# EAGLE board PickupPanel (EAGLE 7.4.0)
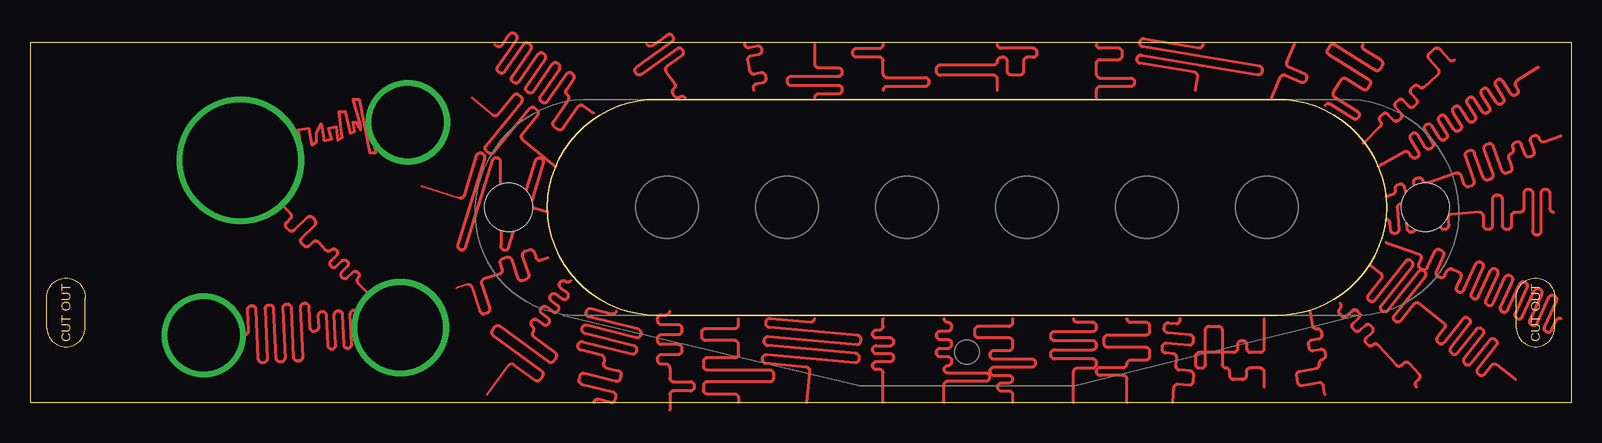
[diagram p0: board, top side]
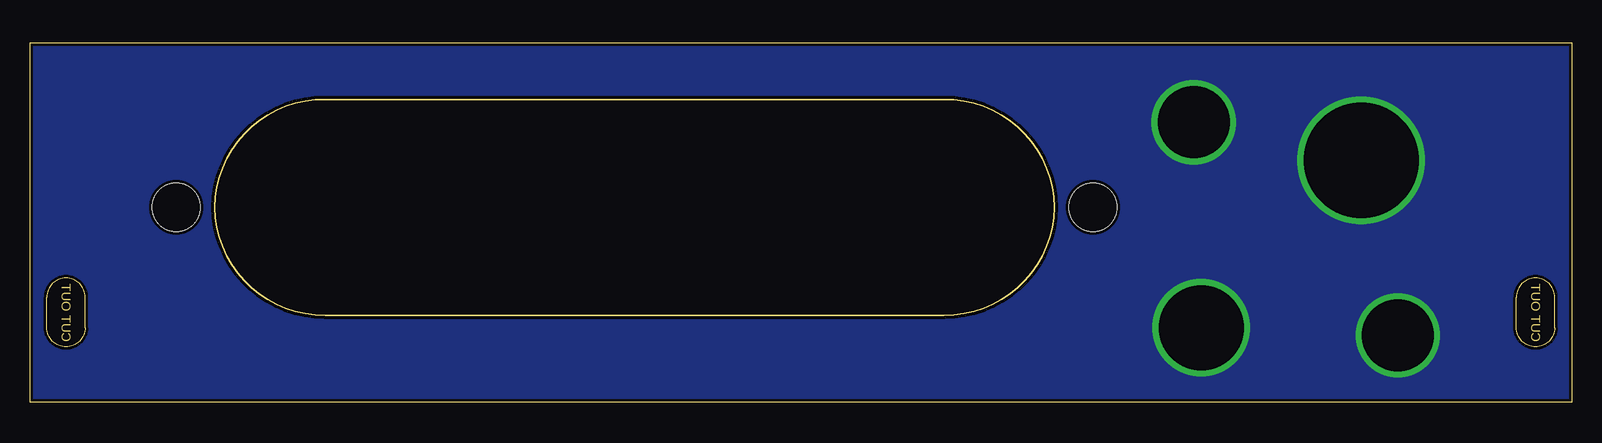
[diagram p1: board, bottom side, seen from below]

Size 128.5 x 30 mm. Coordinates in mm from the lower left corner, seen from the top.
Outline: 0,30 0,0 128.5,0 128.5,30 0,30
Copper layers (1*2*15*16): Top 0.035mm / dielectric 0.2mm / Route2 0.0175mm / dielectric 1.1mm / Route15 0.0175mm / dielectric 0.2mm / Bottom 0.035mm
Design rules "SeeedStudio_DRU_no_angle_20130527": minimum track width 6mil, minimum drill 12mil, track to track 6mil, track to pad 6mil, pad to pad 6mil, via to via 6mil, smd to smd 0mil, copper to edge 10mil, drill to drill 10mil, minimum pad ring 6mil, minimum via ring 6mil, stop-mask expansion 2mil, vias tented up to drill 25mil, thermal gap 10mil
Net classes: 0 default: width 0.203 mm; 1 power: width 0.406 mm; 2 ground: width 0.406 mm

## Footprints (pad centres in the part's own frame; a part is rotated, then mirrored left to right if it is on the bottom)
SINGLE_COIL_CUTOUT = hole 4: -38.2,0; 38.2,0

## Placement (x,y rotation side)
U$1  [SINGLE_COIL_CUTOUT]  78.11,16.27 0 top
U$2  [SLOT_HOLE]  3,7.5 90 top
U$4  [SLOT_HOLE]  125.5,7.5 90 top

## Library data of the parts
U$1 U$2 U$4 = MusicThingModular

## Tracks (layer width: path | path; a pad name or v marks a point on that pad's centre or on a via)
GND  (via drill 6, 7.1, 9.6)
  other vias: 31.5,23.36 14.48,5.58 30.86,6.21 17.52,20.18
  pour Bottom: -8.89,36.2 132.72,35.56 131.44,-0.64 -1.27,-1.27
N$1
  Top 0.254: 125.73,27.94 123.95,26.82 arc90 123.85,26.38 124.02,26.12 arc-90 123.92,25.68 123.86,25.65 arc-90 123.42,25.75 122.76,26.8 arc90 122.32,26.9 122.27,26.86 arc90 122.17,26.43 122.83,25.37 arc-90 122.73,24.94 122.68,24.9 arc-90 122.24,25 121.58,26.05 arc90 121.14,26.15 121.08,26.12 arc90 120.99,25.68 121.65,24.63 arc-90 121.55,24.19 121.5,24.16 arc-90 121.06,24.25 120.39,25.31 arc90 119.96,25.41 119.9,25.37 arc90 119.8,24.93 120.47,23.88 arc-90 120.37,23.44 120.32,23.41 arc-90 119.88,23.51 119.21,24.56 arc90 118.78,24.66 118.72,24.62 arc90 118.62,24.19 119.29,23.14 arc-90 119.19,22.7 119.13,22.66 arc-90 118.7,22.76 118.03,23.81 arc90 117.59,23.91 117.54,23.88 arc90 117.44,23.44 118.11,22.39 arc-90 118.01,21.95 117.95,21.92 arc-90 117.51,22.02 116.85,23.07 arc90 116.41,23.17 116.36,23.13 arc90 116.26,22.69 116.92,21.64 arc-90 116.82,21.2 116.77,21.17 arc-90 116.33,21.27 115.67,22.32 arc90 115.23,22.42 115.17,22.39 arc90 115.08,21.95 115.74,20.89 arc-90 115.64,20.46 115.59,20.42 arc-90 115.15,20.52 114.99,20.78 arc90 114.55,20.88 112.39,19.68
N$2
  Top 0.254: 118.75,28.57 arc-90 118.3,28.6 117.52,29.46 arc90 117.07,29.48 116.64,29.1 arc90 116.62,28.65 117.4,27.79 arc-90 117.37,27.34 116.23,26.31 arc-90 115.78,26.34 arc90 115.34,26.36 115.16,26.2 arc90 115.14,25.76 115.56,25.29 arc-90 115.54,24.84 115.37,24.68 arc-90 114.92,24.7 114.49,25.18 arc90 114.05,25.2 113.87,25.04 arc90 113.85,24.6 114.27,24.12 arc-90 114.25,23.68 114.08,23.52 arc-90 113.63,23.54 113.2,24.02 arc90 112.76,24.04 112.58,23.88 arc90 112.56,23.43 arc-90 112.53,22.99 111.12,21.59
N$3
  Top 0.254: 127.64,22.23 126.25,21.73 arc-90 125.84,21.92 125.8,22.04 arc90 125.39,22.24 125.26,22.19 arc90 125.06,21.78 125.36,20.94 arc-90 125.17,20.53 125.04,20.48 arc-90 124.63,20.68 124.33,21.52 arc90 123.92,21.71 123.79,21.66 arc90 123.6,21.26 123.64,21.14 arc-90 123.45,20.73 arc90 123.26,20.32 123.52,19.59 arc-90 123.33,19.19 123.13,19.12 arc-90 122.73,19.31 121.99,21.37 arc90 121.59,21.56 121.4,21.49 arc90 121.2,21.09 121.94,19.03 arc-90 121.75,18.62 121.56,18.56 arc-90 121.15,18.75 120.42,20.81 arc90 120.01,21 119.82,20.93 arc90 119.63,20.52 120.36,18.47 arc-90 120.17,18.06 119.98,17.99 arc-90 119.57,18.19 119.31,18.91 arc90 118.91,19.11 116.5,18.3 arc-90 116.1,18.5 arc90 115.7,18.7 115.53,18.65 arc90 115.33,18.25 115.53,17.65 arc-90 115.33,17.25 115.17,17.19 arc-90 114.77,17.39 114.57,17.99 arc90 114.17,18.19 114,18.14 arc90 113.8,17.74 arc-90 113.6,17.34 113.03,17.14
N$4
  Top 0.254: 113.03,15.24 arc-90 113.37,14.95 113.42,14.37 arc90 113.76,14.08 113.82,14.09 arc90 114.11,14.43 113.96,16.22 arc-90 114.25,16.56 114.31,16.56 arc-90 114.66,16.27 114.8,14.48 arc90 115.14,14.19 115.2,14.2 arc90 115.49,14.54 115.34,16.33 arc-90 115.64,16.67 115.69,16.68 arc-90 116.04,16.39 116.18,14.6 arc90 116.52,14.31 116.58,14.31 arc90 116.87,14.65 116.73,16.44 arc-90 117.02,16.78 117.08,16.79 arc-90 117.42,16.5 117.56,14.71 arc90 117.91,14.42 117.96,14.42 arc90 118.25,14.77 118.21,15.34 arc-90 118.5,15.69 120.82,15.88 arc-90 121.14,15.56 121.14,14.77 arc90 121.45,14.45 121.61,14.45 arc90 121.93,14.77 121.93,16.98 arc-90 122.25,17.3 122.4,17.3 arc-90 122.72,16.98 122.72,14.77 arc90 123.03,14.45 123.19,14.45 arc90 123.51,14.77 123.51,15.56 arc-90 123.83,15.88 124.23,15.88 arc90 124.55,16.19 124.55,17.46 arc-90 124.87,17.78 124.94,17.78 arc-90 125.26,17.46 125.26,14.29 arc90 125.58,13.97 125.66,13.97 arc90 125.97,14.29 125.97,17.46 arc-90 126.29,17.78 126.36,17.78 arc-90 126.68,17.46 126.68,16.19 arc90 127,15.88
N$5
  Top 0.254: 113.03,13.34 115.79,12.37 arc-90 115.94,11.95 115.77,11.57 arc90 115.93,11.15 116.08,11.08 arc90 116.5,11.24 117.11,12.58 arc-90 117.53,12.73 117.67,12.67 arc-90 117.83,12.25 117.22,10.91 arc90 117.38,10.49 117.53,10.42 arc90 117.95,10.58 118.12,10.96 arc-90 118.55,11.12 119.12,10.86 arc-90 119.27,10.44 118.91,9.64 arc90 119.07,9.22 119.1,9.2 arc90 119.52,9.36 120.51,11.53 arc-90 120.93,11.69 120.96,11.68 arc-90 121.12,11.26 120.13,9.08 arc90 120.29,8.66 120.32,8.65 arc90 120.74,8.81 121.73,10.98 arc-90 122.15,11.14 122.19,11.12 arc-90 122.34,10.7 121.36,8.53 arc90 121.51,8.11 121.55,8.09 arc90 121.97,8.25 122.95,10.42 arc-90 123.37,10.58 123.41,10.57 arc-90 123.56,10.15 122.58,7.97 arc90 122.73,7.55 122.77,7.54 arc90 123.19,7.7 124.17,9.87 arc-90 124.59,10.03 124.63,10.01 arc-90 124.79,9.59 123.8,7.42 arc90 123.96,7 123.99,6.98 arc90 124.41,7.14 125.4,9.31 arc-90 125.82,9.47 125.85,9.46 arc-90 126.01,9.04 125.02,6.86 arc90 125.18,6.44 125.21,6.43 arc90 125.63,6.59 126.62,8.76 arc-90 127.04,8.91 127.07,8.9 arc-90 127.23,8.48 126.24,6.31 arc90 126.4,5.89 126.43,5.87 arc90 126.85,6.03 127.22,6.83 arc-90 127.64,6.99
N$6
  Top 0.254: 111.76,11.43 112.6,10.76 arc-90 112.66,10.32 111.57,8.94 arc90 111.62,8.5 111.67,8.46 arc90 112.11,8.52 114.67,11.77 arc-90 115.12,11.82 115.16,11.79 arc-90 115.22,11.34 112.65,8.09 arc90 112.7,7.64 112.74,7.61 arc90 113.19,7.66 115.75,10.91 arc-90 116.2,10.97 116.24,10.93 arc-90 116.29,10.49 113.73,7.24 arc90 113.78,6.79 113.82,6.76 arc90 114.27,6.81 115.36,8.19 arc-90 115.8,8.24 117.85,6.62 arc-90 117.91,6.17 117.32,5.44 arc90 117.38,4.99 117.44,4.94 arc90 117.88,5 119.44,6.97 arc-90 119.89,7.02 119.94,6.97 arc-90 120,6.53 118.44,4.55 arc90 118.49,4.11 118.55,4.06 arc90 119,4.11 120.56,6.09 arc-90 121,6.14 121.06,6.09 arc-90 121.11,5.65 119.56,3.67 arc90 119.61,3.23 119.67,3.18 arc90 120.12,3.23 121.67,5.21 arc-90 122.12,5.26 122.18,5.21 arc-90 122.23,4.76 120.67,2.79 arc90 120.73,2.35 120.79,2.3 arc90 121.23,2.35 121.81,3.09 arc-90 122.26,3.14 123.83,1.91
N$7
  Top 0.254: 115.57,1.27 115.54,1.3 arc-90 115.56,1.75 115.76,1.93 arc90 115.78,2.38 114.98,3.25 arc90 114.53,3.27 114.34,3.1 arc-90 113.89,3.12 112.4,4.76 arc90 111.95,4.78 arc-90 111.5,4.8 111.38,4.94 arc-90 111.4,5.38 111.87,5.81 arc90 111.89,6.26 111.77,6.4 arc90 111.32,6.42 110.85,5.99 arc-90 110.4,6.01 110.28,6.15 arc-90 110.3,6.6 110.77,7.02 arc90 110.79,7.47 110.67,7.61 arc90 110.22,7.63 109.75,7.2 arc-90 109.3,7.22 109.18,7.36 arc-90 109.2,7.81 arc90 109.22,8.26
N$8
  Top 0.254: 106.68,7.62 106.9,6.4 arc90 107.27,6.14 arc-90 107.64,5.88 107.68,5.66 arc-90 107.43,5.29 106.8,5.17 arc90 106.55,4.8 106.59,4.57 arc90 106.96,4.32 107.58,4.43 arc-90 107.95,4.17 107.99,3.94 arc-90 107.74,3.58 arc90 107.48,3.21 arc-90 107.23,2.84 105.84,2.58 arc90 105.58,2.21 105.69,1.64 arc90 106.06,1.39 107.44,1.64 arc-90 107.81,1.38 107.95,0.64
N$9
  Top 0.254: 102.87,6.99 102.87,4.47 arc-90 102.55,4.15 101.76,4.15 arc-90 101.44,4.47 101.44,4.81 arc90 101.12,5.13 100.97,5.13 arc90 100.65,4.81 100.65,4.47 arc-90 100.33,4.15 97.47,4.15 arc90 97.16,3.83 97.16,3.17 arc90 97.47,2.86 97.67,2.86 arc90 97.98,3.17 97.98,6.03 arc-90 98.3,6.35 99.06,6.35 arc-90 99.38,6.03 99.38,3.17 arc90 99.69,2.86 arc-90 100.01,2.54 100.01,2.22 arc90 100.33,1.91 101.07,1.91 arc90 101.39,2.22 101.39,2.54 arc-90 101.71,2.86 102.55,2.86 arc-90 102.87,2.54 102.87,1.27
N$10
  Top 0.254: 95.25,0 95.36,1.24 arc-90 95.71,1.53 96.62,1.44 arc90 96.97,1.73 97.01,2.26 arc90 96.73,2.61 95.81,2.69 arc-90 95.53,3.03 95.59,3.7 arc90 95.3,4.05 94.67,4.11 arc-90 94.39,4.45 94.4,4.66 arc-90 94.75,4.95 96.64,4.78 arc90 96.98,5.07 97,5.28 arc90 96.71,5.62 94.83,5.79 arc-90 94.54,6.14 94.56,6.35 arc-90 94.9,6.64 95.53,6.58 arc90 95.88,6.87 95.89,6.99
N$11
  Top 0.254: 91.44,0 91.44,1.92 arc90 91.12,2.24 89.22,2.24 arc-90 88.9,2.56 88.9,2.59 arc-90 89.22,2.9 91.12,2.9 arc90 91.44,3.22 arc-90 91.76,3.54 93.03,3.54 arc90 93.34,3.86 93.34,4.26 arc90 93.03,4.58 89.85,4.58 arc-90 89.53,4.9 89.53,5.31 arc-90 89.85,5.62 93.03,5.62 arc90 93.34,5.94 93.34,6.35 arc90 93.03,6.67 91.76,6.67 arc-90 91.44,6.99
N$12
  Top 0.254: 87,0 87,2.55 arc-90 87.31,2.86 88.58,2.86 arc90 88.9,3.18 88.9,3.31 arc90 88.58,3.62 85.41,3.62 arc-90 85.09,3.94 85.09,4.07 arc-90 85.41,4.38 88.58,4.38 arc90 88.9,4.7 88.9,4.83 arc90 88.58,5.15 85.41,5.15 arc-90 85.09,5.46 85.09,5.59 arc-90 85.41,5.91 88.58,5.91 arc90 88.9,6.22 88.9,6.35 arc90 88.58,6.67 87.31,6.67 arc-90 87,6.99
N$13
  Top 0.254: 81.92,6.99 81.92,6.65 arc-90 81.6,6.33 79.06,6.33 arc90 78.74,6.01 78.74,5.71 arc90 79.06,5.4 81.6,5.4 arc-90 81.92,5.08 81.92,4.62 arc-90 81.6,4.31 80.33,4.31 arc90 80.01,3.99 80.01,3.94 arc90 80.33,3.62 83.5,3.62 arc-90 83.82,3.3 83.82,3.25 arc-90 83.5,2.93 80.33,2.93 arc90 80.01,2.61 80.01,2.56 arc90 80.33,2.24 81.6,2.24 arc-90 81.92,1.92 arc-90 81.6,1.6 80.96,1.6 arc90 80.64,1.29 80.64,1.27 arc90 80.96,0.95 81.6,0.95 arc-90 81.92,0.64 81.92,0
N$14
  Top 0.254: 76.2,0 76.2,1.46 arc-90 76.52,1.77 79.69,1.77 arc90 80.01,2.09 80.01,2.12 arc90 79.69,2.44 76.52,2.44 arc-90 76.2,2.75 arc-90 76.52,3.07 arc90 76.83,3.39 76.83,3.47 arc90 76.52,3.79 75.88,3.79 arc-90 75.56,4.11 75.56,4.19 arc-90 75.88,4.51 76.52,4.51 arc90 76.83,4.83 76.83,4.91 arc90 76.52,5.23 75.88,5.23 arc-90 75.56,5.55 75.56,5.63 arc-90 75.88,5.95 76.52,5.95 arc90 76.83,6.27 76.83,6.35 arc90 76.52,6.67 arc-90 76.2,6.99
N$15
  Top 0.254: 71.12,0 71.12,2.42 arc90 70.8,2.74 70.55,2.74 arc-90 70.23,3.06 70.23,3.08 arc-90 70.55,3.4 71.69,3.4 arc90 72.01,3.71 72.01,3.74 arc90 71.69,4.06 70.55,4.06 arc-90 70.23,4.37 70.23,4.4 arc-90 70.55,4.71 71.69,4.71 arc90 72.01,5.03 72.01,5.06 arc90 71.69,5.37 70.55,5.37 arc-90 70.23,5.69 70.23,5.71 arc-90 70.55,6.03 70.8,6.03 arc90 71.12,6.35 71.12,6.99
N$16
  Top 0.254: 64.77,0 65,2.59 arc90 64.72,2.93 61.35,3.24 arc-90 61.07,3.58 61.08,3.7 arc-90 61.42,3.99 68.78,3.32 arc90 69.13,3.61 69.14,3.73 arc90 68.85,4.07 61.49,4.74 arc-90 61.2,5.09 61.21,5.21 arc-90 61.56,5.5 68.92,4.83 arc90 69.26,5.12 69.28,5.24 arc90 68.99,5.58 61.63,6.25 arc-90 61.34,6.59 61.35,6.72 arc-90 61.7,7 65.06,6.7 arc90 65.41,6.99
N$17
  Top 0.254: 59.05,6.99 59.05,6.48 arc-90 58.74,6.16 56.33,6.16 arc90 56.01,5.84 56.01,5.48 arc90 56.33,5.16 58.74,5.16 arc-90 59.05,4.84 59.05,4.02 arc-90 58.74,3.7 56.45,3.7 arc90 56.13,3.38 56.13,3.02 arc90 56.45,2.7 61.66,2.7 arc-90 61.98,2.38 61.98,2.02 arc-90 61.66,1.7 56.45,1.7 arc90 56.13,1.38 56.13,1.02 arc90 56.45,0.7 58.74,0.7 arc-90 59.05,0.38 59.05,0
N$18
  Top 0.254: 53.34,-0.64 53.34,0.64 arc-90 53.66,0.95 55.05,0.95 arc90 55.37,1.27 55.37,1.4 arc90 55.05,1.72 53.66,1.72 arc-90 53.34,2.03 53.34,2.86 arc90 53.02,3.17 52.64,3.17 arc-90 52.32,3.49 52.32,3.68 arc-90 52.64,4 54.04,4 arc90 54.36,4.32 54.36,4.51 arc90 54.04,4.83 52.64,4.83 arc-90 52.32,5.14 52.32,5.33 arc-90 52.64,5.65 54.04,5.65 arc90 54.36,5.97 54.36,6.16 arc90 54.04,6.48 52.64,6.48 arc-90 52.32,6.79 52.32,6.99 arc-90 52.64,7.3 53.02,7.3 arc90 53.34,7.62
N$19
  Top 0.254: 46.99,0 arc-90 47.38,0.23 48.37,-0.02 arc90 48.76,0.21 48.83,0.48 arc90 48.59,0.87 45.98,1.52 arc-90 45.75,1.91 45.82,2.17 arc-90 46.2,2.41 48.81,1.75 arc90 49.2,1.98 49.27,2.25 arc90 49.04,2.64 48.04,2.89 arc-90 47.81,3.27 47.88,3.55 arc90 47.65,3.93 45.9,4.37 arc-90 45.67,4.75 45.69,4.83 arc-90 46.07,5.06 50.18,4.03 arc90 50.56,4.26 50.58,4.34 arc90 50.35,4.72 46.25,5.75 arc-90 46.02,6.14 46.03,6.21 arc-90 46.42,6.44 50.52,5.42 arc90 50.91,5.65 50.93,5.72 arc90 50.7,6.11 46.59,7.13 arc-90 46.36,7.52 46.38,7.59 arc-90 46.77,7.83 48.51,7.39 arc90 48.9,7.62
N$20
  Top 0.152: 38.1,0.64 39.89,3.07
  Top 0.203: 39.89,3.07 arc-90 40.33,3.14 42.09,1.85
  Top 0.254: 42.09,1.85 arc90 42.54,1.92 42.72,2.17 arc90 42.66,2.62 38.62,5.58 arc-90 38.55,6.02 38.74,6.28 arc-90 39.18,6.34 43.22,3.38 arc90 43.66,3.45 43.85,3.71 arc90 43.78,4.15 42.02,5.44 arc-90 41.95,5.89 arc90 41.88,6.33 arc-90 41.81,6.78 41.83,6.8 arc-90 42.28,6.87 42.79,6.49 arc90 43.23,6.56 43.25,6.59 arc90 43.18,7.03 42.67,7.41 arc-90 42.6,7.85 42.62,7.87 arc-90 43.06,7.94 43.58,7.57 arc90 44.02,7.63 44.04,7.66 arc90 43.97,8.1 43.46,8.48 arc-90 43.39,8.92 43.41,8.95 arc-90 43.85,9.02 44.37,8.64 arc90 44.81,8.71 44.83,8.73 arc90 44.76,9.18 44.25,9.55 arc-90 44.18,10 44.2,10.02 arc-90 44.64,10.09 arc90 45.09,10.16
N$21
  Top 0.152: 36.44,9.82 35.56,9.53
  Top 0.203: 37.51,7.59 36.84,9.62 arc90 36.44,9.82
  Top 0.254: 37.51,7.59 arc90 37.91,7.39 38.11,7.45 arc90 38.31,7.86 37.64,9.88 arc-90 37.84,10.28 39.17,10.73 arc90 39.37,11.13 39.22,11.59 arc-90 39.42,12 39.75,12.11 arc-90 40.15,11.9 40.66,10.37 arc90 41.06,10.17 41.39,10.28 arc90 41.59,10.69 41.08,12.22 arc-90 41.28,12.62 41.61,12.73 arc-90 42.01,12.53 42.17,12.06 arc90 42.57,11.86 43.18,12.06
N$22
  Top 0.152: 32.64,18.03 35.82,17.06
  Top 0.254: 35.82,17.06 arc90 36.22,17.27 37.24,20.59 arc-90 37.63,20.8 37.68,20.78 arc-90 37.89,20.39 35.66,13.14 arc90 35.87,12.74 35.92,12.73 arc90 36.31,12.94 38.54,20.18 arc-90 38.94,20.39 38.98,20.38 arc-90 39.2,19.98 39.25,13.12 arc90 39.46,12.72 39.51,12.71 arc90 39.9,12.92 42.13,20.16 arc-90 42.53,20.37 42.58,20.36 arc-90 42.79,19.96 41.77,16.64 arc90 41.98,16.25 43.18,15.88
N$23
  Top 0.152: 38.57,23.97 36.83,25.4
  Top 0.254: 43.81,19.68 41.07,21.93 arc-90 41.02,22.38 42.31,23.95 arc90 42.27,24.39 42.09,24.54 arc90 41.64,24.49 38.67,20.86 arc-90 38.22,20.82 38.05,20.96 arc-90 38,21.41 40.97,25.04 arc90 40.93,25.49 40.75,25.63 arc90 40.3,25.59 39.02,24.02 arc-90 38.57,23.97
N$24
  Top 0.203: 38.91,29.72 38.73,29.84
  Top 0.254: 46.99,24.13 46.12,24.73 arc90 45.68,24.65 44.44,22.86 arc-90 44,22.78 43.71,22.98 arc-90 43.63,23.42 44.87,25.21 arc90 44.79,25.65 arc-90 44.71,26.09 45.31,26.96 arc90 45.23,27.41 45.16,27.46 arc90 44.72,27.38 43.15,25.11 arc-90 42.71,25.03 42.64,25.08 arc-90 42.56,25.52 44.12,27.79 arc90 44.05,28.23 43.97,28.28 arc90 43.53,28.2 41.96,25.94 arc-90 41.52,25.86 41.45,25.91 arc-90 41.37,26.35 42.94,28.61 arc90 42.85,29.05 42.78,29.11 arc90 42.34,29.02 40.77,26.76 arc-90 40.33,26.68 40.26,26.73 arc-90 40.18,27.17 41.74,29.44 arc90 41.66,29.88 41.59,29.93 arc90 41.15,29.85 39.58,27.58 arc-90 39.14,27.5 39.07,27.55 arc-90 38.99,28 40.55,30.26 arc90 40.47,30.7 40.4,30.75 arc90 39.96,30.67 39.35,29.8 arc-90 38.91,29.72
N$25
  Top 0.254: 54.61,25.4 arc90 54.17,25.47 arc-90 53.72,25.55 53.6,25.73 arc-90 53.67,26.17 arc90 53.74,26.61 53.04,27.6 arc-90 53.12,28.04 54.34,28.91 arc90 54.41,29.36 54.37,29.42 arc90 53.93,29.49 50.96,27.37 arc-90 50.52,27.45 50.47,27.51 arc-90 50.55,27.95 53.52,30.07 arc90 53.59,30.51 53.55,30.57 arc90 53.1,30.65 51.88,29.77 arc-90 51.44,29.84
N$26
  Top 0.254: 59.56,29.97 59.59,29.84 arc90 59.96,29.58 60.63,29.71 arc-90 61,29.46 61.01,29.4 arc-90 60.76,29.03 60.09,28.9 arc90 59.84,28.53 60,27.64 arc90 60.38,27.39 60.93,27.5 arc-90 61.3,27.26 61.34,27.04 arc-90 61.09,26.66 60.55,26.55 arc90 60.3,26.18 60.33,26.04
N$27
  Top 0.254: 65.41,29.84 65.41,28.23 arc90 65.72,27.92 67.37,27.92 arc-90 67.69,27.6 67.69,27.5 arc-90 67.37,27.18 63.44,27.18 arc90 63.12,26.87 63.12,26.77 arc90 63.44,26.45 67.37,26.45 arc-90 67.69,26.13 67.69,26.04 arc-90 67.37,25.72 65.72,25.72 arc90 65.41,25.4
N$28
  Top 0.254: 71.12,29.84 arc-90 70.8,29.53 68.9,29.53 arc90 68.58,29.21 68.58,29.11 arc90 68.9,28.79 70.8,28.79 arc-90 71.12,28.48 71.12,27.41 arc90 71.44,27.09 74.61,27.09 arc-90 74.93,26.77 74.93,26.67 arc-90 74.61,26.35 71.44,26.35 arc90 71.12,26.04
N$29
  Top 0.254: 80.64,26.04 80.64,26.96 arc90 80.33,27.28 75.88,27.28 arc-90 75.56,27.6 75.56,27.83 arc-90 75.88,28.15 80.33,28.15 arc90 80.64,28.46 arc-90 80.96,28.78 81.15,28.78 arc-90 81.47,28.46 81.47,27.62 arc90 81.79,27.3 82.5,27.3 arc90 82.82,27.62 82.82,28.46 arc-90 83.14,28.78 83.63,28.78 arc90 83.95,29.1 83.95,29.21 arc90 83.63,29.53 80.96,29.53 arc-90 80.64,29.84
N$30
  Top 0.254: 88.9,29.84 arc90 89.22,29.53 90.74,29.53 arc-90 91.06,29.21 91.06,28.92 arc-90 90.74,28.6 89.22,28.6 arc90 88.9,28.28 88.9,27.36 arc90 89.22,27.05 91.76,27.05 arc-90 92.08,26.73 92.08,26.67 arc-90 91.76,26.35 89.22,26.35 arc90 88.9,26.04 88.9,25.4
N$31
  Top 0.254: 97.16,26.04 97.34,27.16 arc90 97.08,27.53 92.54,28.28 arc-90 92.28,28.65 92.29,28.71 arc-90 92.65,28.97 102.36,27.35 arc90 102.73,27.61 102.74,27.67 arc90 102.48,28.04 92.77,29.66 arc-90 92.51,30.02 92.52,30.08 arc-90 92.88,30.34 97.42,29.58 arc90 97.79,29.84
N$32
  Top 0.254: 103.5,25.4 104.24,27.12 arc-90 104.66,27.29 105.98,26.73 arc90 106.39,26.89 106.43,26.98 arc90 106.26,27.39 104.95,27.96 arc-90 104.78,28.37 105.41,29.84
N$33
  Top 0.254: 107.95,24.77 arc-90 108.39,24.87 110.3,23.67 arc90 110.74,23.77 110.78,23.82 arc90 110.67,24.26 108.76,25.46 arc-90 108.66,25.9 109.28,26.9 arc-90 109.72,27 111.12,26.12 arc90 111.56,26.22 111.72,26.49 arc90 111.62,26.93 108.28,29.01 arc-90 108.18,29.45 108.35,29.72 arc-90 108.78,29.82 112.13,27.73 arc90 112.56,27.83 112.73,28.09 arc90 112.63,28.53 111.23,29.41 arc-90 111.12,29.84
N$34
  Top 0.254: 17.53,20.07 21.71,15.76 arc-90 21.7,15.31 21.39,15.01 arc90 21.39,14.56 21.57,14.37 arc90 22.02,14.36 23.1,15.41 arc-90 23.55,15.4 23.74,15.21 arc-90 23.74,14.76 22.65,13.71 arc90 22.65,13.26 22.84,13.07 arc90 23.29,13.06 23.6,13.37 arc-90 24.05,13.36 24.64,12.71 arc90 25.09,12.71 arc-90 25.54,12.7 25.55,12.69 arc-90 25.54,12.24 25.09,11.8 arc90 25.08,11.35 25.09,11.34 arc90 25.54,11.34 26,11.78 arc-90 26.45,11.77 26.45,11.76 arc-90 26.45,11.31 25.99,10.87 arc90 25.99,10.42 26,10.41 arc90 26.45,10.41 26.9,10.85 arc-90 27.35,10.84 27.36,10.83 arc-90 27.35,10.38 arc90 27.35,9.94 30.99,6.22 29.39,6.15 arc-90 27.41,6.45 27.37,7.4 arc90 27.03,7.7 27,7.7 arc90 26.7,7.37 26.82,4.84 arc-90 26.51,4.51 26.48,4.51 arc-90 26.15,4.81 26.04,7.33 arc90 25.7,7.64 25.67,7.64 arc90 25.37,7.3 25.49,4.78 arc-90 25.18,4.45 25.15,4.45 arc-90 24.82,4.75 24.71,7.27 arc90 24.37,7.58 24.34,7.58 arc90 24.04,7.24 24.08,6.3 arc-90 23.78,5.97 23.69,5.89 arc-90 23.36,6.19 23.28,7.93 arc90 22.95,8.24 22.84,8.23 arc90 22.54,7.9 22.73,3.78 arc-90 22.43,3.45 22.32,3.44 arc-90 21.99,3.75 21.8,7.87 arc90 21.47,8.17 21.37,8.16 arc90 21.06,7.83 21.25,3.71 arc-90 20.95,3.38 20.85,3.38 arc-90 20.51,3.68 20.32,7.8 arc90 19.99,8.1 19.89,8.1 arc90 19.59,7.77 19.78,3.64 arc-90 19.47,3.31 19.37,3.31 arc-90 19.04,3.61 18.85,7.73 arc90 18.52,8.04 18.41,8.03 arc90 18.11,7.7 18.19,5.96 arc-90 17.89,5.62 14.35,5.46
N$35
  Top 0.254: 22.61,21.46 22.35,22.73 23.24,22.86 23.5,21.46 23.88,21.72 23.88,22.48 24.26,23.24 24.51,21.84 25.15,21.97 24.89,22.86 25.53,22.99 25.65,21.84 26.04,22.1 25.78,24.26 26.29,24.26 26.67,22.48 27.05,22.61 26.92,23.37 27.18,23.37 27.56,22.73 27.56,23.11 26.92,25.27 27.43,25.27 28.32,20.83 28.83,20.83 28.57,23.88 31.5,23.88